# EAGLE board AP_Board_1 (EAGLE 7.2.0)

Size 172.72 x 58.42 mm. Coordinates in mm from the lower left corner, seen from the top.
Outline: 0,58.42 0,0 172.72,0 172.72,58.42 0,58.42
Copper layers (1*16): Top 0.035mm / dielectric 1.5mm / Bottom 0.035mm
Design rules "RadioStack_v2": minimum track width 0.2mm, minimum drill 0.4mm, track to track 0.2mm, track to pad 0.2mm, pad to pad 0.2mm, via to via 0.2mm, smd to smd 0.2mm, copper to edge 0.5mm, drill to drill 8mil, minimum pad ring 10mil, minimum via ring 8mil, stop-mask expansion 4mil, vias tented up to drill 0mil, thermal gap 10mil

## Footprints (pad centres in the part's own frame; a part is rotated, then mirrored left to right if it is on the bottom)
ELMA_E37 = drill 0.889 pad 1.27 offset: 1 0,0; 2 0,-2.54; 3 0,-5.08; 4 0,-7.62; 5 0,-10.16; 6 13.97,-10.16; 7 13.97,-7.62; 8 13.97,-5.08; 9 13.97,-2.54; 10 13.97,0 | hole 3.048: 6.985,1.27; 6.985,-11.43
SA3611EWA = drill 0.889 pad 1.27 offset: 1 0,0; 2 0,-2.54; 3 0,-5.08; 4 0,-7.62; 5 0,-10.16; 6 5.08,-10.16; 7 5.08,-7.62; 8 5.08,-5.08; 9 5.08,-2.54; 10 5.08,0
P1-0S = drill 0.762 pad 1.27 offset: 1 0,0; 2 2.54,0; 3 5.08,0; 4 0,-5.08; 5 2.54,-5.08; 6 5.08,-5.08
PSA39-21EWA = drill 0.889 pad 1.27 offset: P$1 0,0; P$2 0,-2.54; P$3 0,-5.08; P$4 0,-7.62; P$5 0,-10.16; P$6 0,-12.7; P$7 0,-15.24; P$8 0,-17.78; P$9 7.62,-17.78; P$10 7.62,-15.24; P$11 7.62,-12.7; P$12 7.62,-10.16; P$13 7.62,-7.62; P$14 7.62,-5.08; P$15 7.62,-2.54; P$16 7.62,0
LISTA_2X10 = drill 0.889 pad 1.27 offset: 1 0,0; 2 0,-2.54; 3 0,-5.08; 4 0,-7.62; 5 0,-10.16; 6 0,-12.7; 7 0,-15.24; 8 0,-17.78; 9 0,-20.32; 10 0,-22.86; 11 2.54,-22.86; 12 2.54,-20.32; 13 2.54,-17.78; 14 2.54,-15.24; 15 2.54,-12.7; 16 2.54,-10.16; 17 2.54,-7.62; 18 2.54,-5.08; 19 2.54,-2.54; 20 2.54,0

## Placement (x,y rotation side)
U$1  ELMA_E37  [ELMA_E37]  143.51,41.91 0 top
U$2  SA3611EWA  [SA3611EWA]  85.09,50.8 0 top
U$3  P1-0S  [P1-0S]  26.67,8.89 0 top
U$4  P1-0S  [P1-0S]  49.53,8.89 0 top
U$5  P1-0S  [P1-0S]  72.39,8.89 0 top
U$6  P1-0S  [P1-0S]  95.25,8.89 0 top
U$7  P1-0S  [P1-0S]  118.11,8.89 0 top
U$8  P1-0S  [P1-0S]  140.97,8.89 0 top
U$9  SA3611EWA  [SA3611EWA]  92.71,50.8 0 top
U$10  SA3611EWA  [SA3611EWA]  100.33,50.8 0 top
U$11  SA3611EWA  [SA3611EWA]  107.95,50.8 0 top
U$12  SA3611EWA  [SA3611EWA]  115.57,50.8 0 top
U$13  SA3611EWA  [SA3611EWA]  85.09,33.02 0 top
U$14  SA3611EWA  [SA3611EWA]  92.71,33.02 0 top
U$15  SA3611EWA  [SA3611EWA]  100.33,33.02 0 top
U$16  SA3611EWA  [SA3611EWA]  107.95,33.02 0 top
U$17  SA3611EWA  [SA3611EWA]  115.57,33.02 0 top
U$18  PSA39-21EWA  [PSA39-21EWA]  6.35,55.88 0 top
U$19  PSA39-21EWA  [PSA39-21EWA]  16.51,55.88 0 top
U$20  PSA39-21EWA  [PSA39-21EWA]  26.67,55.88 0 top
U$21  PSA39-21EWA  [PSA39-21EWA]  41.91,55.88 0 top
U$22  PSA39-21EWA  [PSA39-21EWA]  52.07,55.88 0 top
U$23  PSA39-21EWA  [PSA39-21EWA]  62.23,55.88 0 top
U$24  PSA39-21EWA  [PSA39-21EWA]  13.97,17.78 180 top
U$25  PSA39-21EWA  [PSA39-21EWA]  24.13,17.78 180 top
U$26  PSA39-21EWA  [PSA39-21EWA]  34.29,17.78 180 top
U$27  PSA39-21EWA  [PSA39-21EWA]  49.53,17.78 180 top
U$28  PSA39-21EWA  [PSA39-21EWA]  59.69,17.78 180 top
U$29  PSA39-21EWA  [PSA39-21EWA]  69.85,17.78 180 top
U$30  LISTA_2X10  [LISTA_2X10]  133.35,46.99 0 bottom
U$31  LISTA_2X10  [LISTA_2X10]  76.2,48.26 0 top

## Library data of the parts
U$1-U$31 = RadioStack_v2

## Nets
N$1: U$19.P$14 U$19.P$16

## Tracks (layer width: path | path; a pad name or v marks a point on that pad's centre or on a via)
N$1  (1 unrouted)